# EAGLE board MakeAI_EaglePCBBoard (EAGLE 9.3.0)
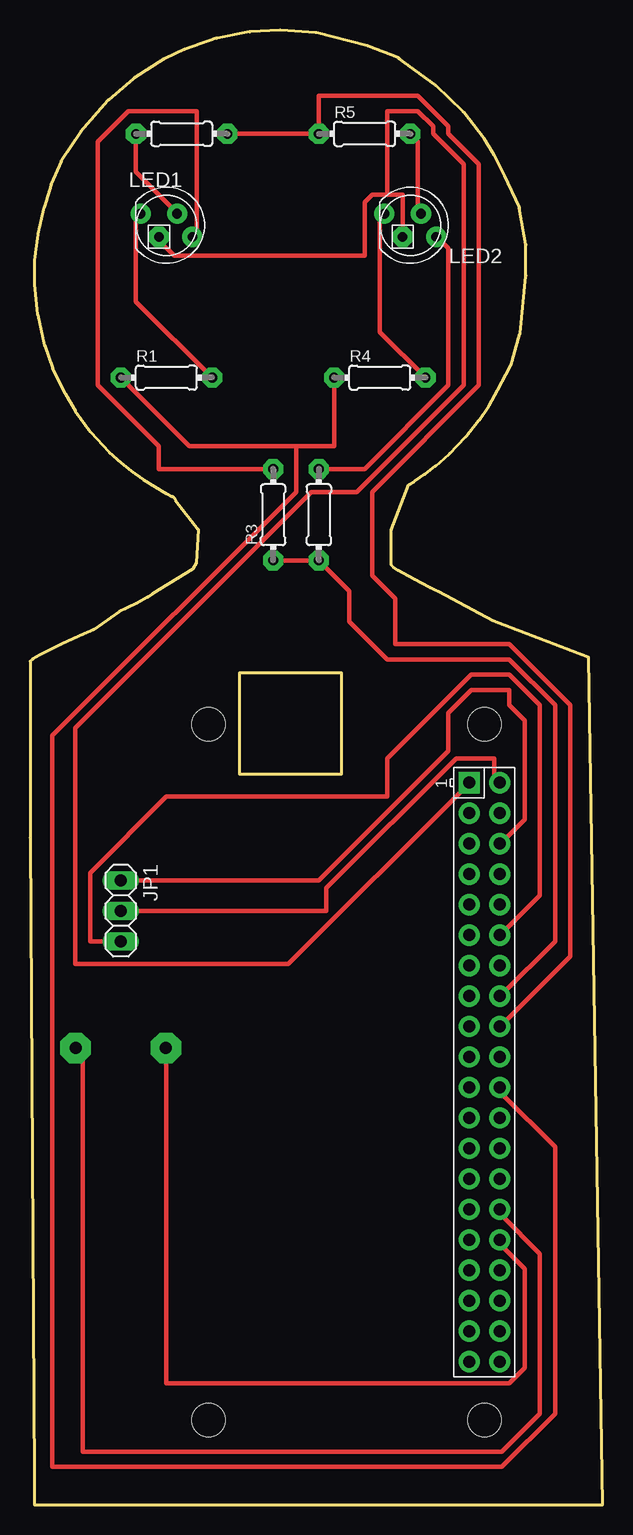
[diagram p0: board, top side]
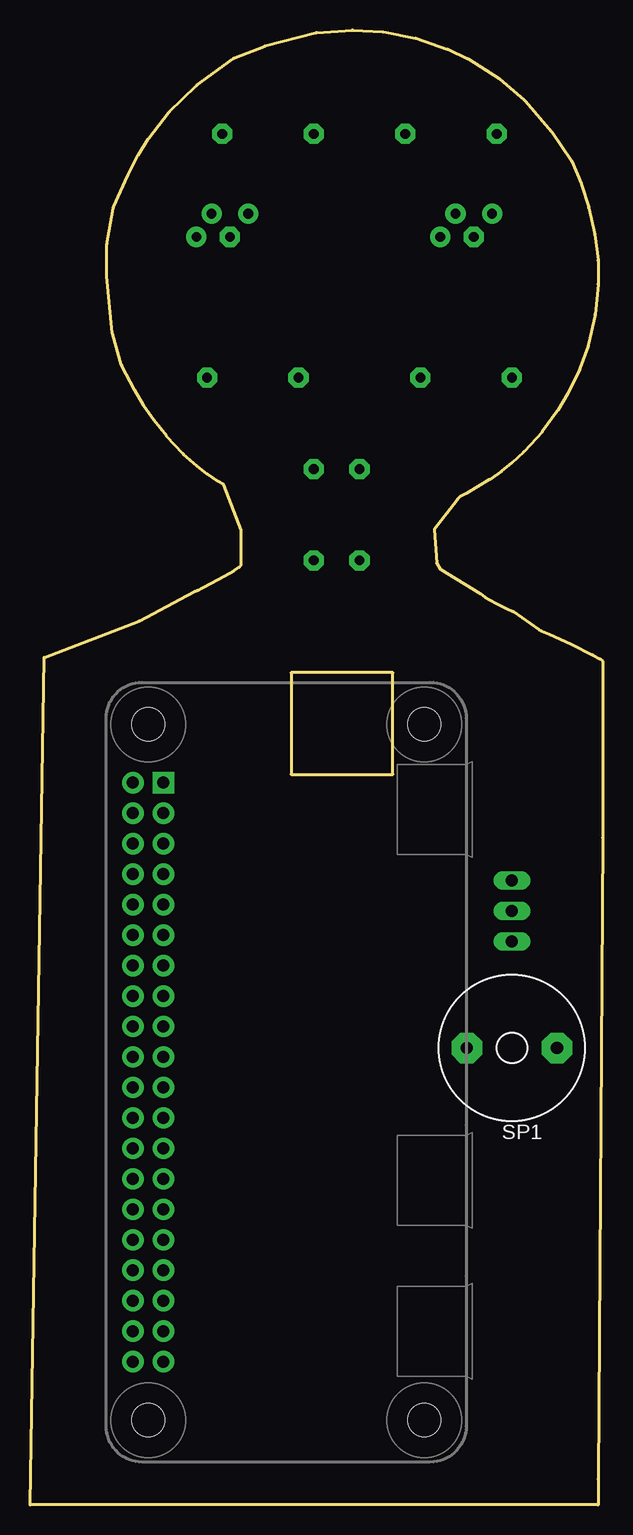
[diagram p1: board, bottom side, seen from below]

Size 47.72 x 122.96 mm. Coordinates in mm from the lower left corner, seen from the top.
Outline: 0,55.62 0.37,2.17 0.37,0 47.72,0 46.54,70.66 38.62,73.71 34.03,76.15 33.79,76.25 33.32,76.47 31.98,77.17 30.69,77.9 30.28,78.17 30.12,78.33 30.12,81.28 31.58,85.04 32.03,85.32 32.05,85.33 32.91,85.92 32.93,85.94 33.77,86.59 33.8,86.61 34.94,87.62 34.97,87.65 36.32,89.06 36.34,89.09 37.4,90.42 37.42,90.44 38.23,91.61 38.25,91.65 38.97,92.94 40.06,94.98 arc12 40.1,95.07 40.83,97.59 arc11 40.85,97.68 41.33,102.45 41.33,102.5 41.33,104.98 arc10 41.32,105.07 40.79,108.1 arc15 40.75,108.21 39.56,110.82 38.72,112.48 38.7,112.52 37.85,113.91 37.81,113.95 36.15,116.09 36.1,116.14 33.86,118.3 33.81,118.34 30.78,120.57 arc15 30.67,120.63 28.17,121.61 28.11,121.63 23.89,122.73 arc10 23.81,122.74 20.88,122.96 20.82,122.96 18.33,122.81 18.27,122.8 15.6,122.28 15.53,122.26 12.93,121.37 12.88,121.35 11.25,120.57 11.2,120.55 8.66,118.94 8.61,118.9 6.52,117.11 arc9 6.47,117.06 4.25,114.47 4.21,114.43 2.63,112.1 arc11 2.59,112.02 1.78,110.16 1.76,110.11 1.17,108.17 1.16,108.14 0.66,105.94 0.65,105.89 0.37,103.79 0.37,103.73 0.37,101.78 0.37,101.73 0.62,99.27 0.63,99.22 1.2,96.7 1.21,96.64 1.89,94.72 1.91,94.66 2.91,92.68 2.92,92.65 3.76,91.23 3.78,91.19 5.02,89.49 5.05,89.44 6.55,87.82 6.58,87.79 7.59,86.87 7.61,86.85 8.4,86.21 8.43,86.19 9.42,85.48 9.45,85.46 11.35,84.33 11.38,84.31 11.87,84.07 arc-45 12.11,83.79 14.02,81.32 13.84,78.51 13.54,78.02 10.22,75.99 9.82,75.67 8.92,75.18 7.98,74.73 7.45,74.5 5.3,72.98 5.07,72.87 4.47,72.6 2.63,71.76 0.8,70.86 0.21,70.53 0,70.34 0,55.62
Outline: 25.96,60.9 17.48,60.9 17.48,69.38 25.96,69.38 25.96,60.9
Copper layers (1*16): Top 0.035mm / dielectric 1.5mm / Bottom 0.035mm
Design rules "default": minimum track width 6mil, minimum drill 0.35mm, track to track 6mil, track to pad 6mil, pad to pad 6mil, via to via 6mil, smd to smd 6mil, copper to edge 40mil, drill to drill 6mil, minimum pad ring 10mil, minimum via ring 8mil, stop-mask expansion 4mil, vias tented up to drill 0mil, thermal gap 10mil
Net classes: 0 default: width 0.381 mm, drill 0.533 mm, clearance 0.406 mm

## Footprints (pad centres in the part's own frame; a part is rotated, then mirrored left to right if it is on the bottom)
1X03 = drill 1.016 long: 1 -2.54,0; 2 0,0; 3 2.54,0
LED5MMRGB = drill 0.8 pad 1.676: 1 -2.159,0.968; 3 0.889,0.968; 4 2.159,-0.968 | drill 0.8 pad 1.676 octagon: 2 -0.635,-0.968
0204/7 = drill 0.813 pad 1.676 octagon: 1 -3.81,0; 2 3.81,0
AL60P = drill 1.016 pad 2.54 octagon: 1 -3.759,0; 2 3.759,0
RASPBERRYPI_BASTELSTUBE_V13_RASPI_BOARD_B+_FULL = drill 1 pad 1.778 square: 1 8.37,25.23 | drill 1 pad 1.778: 2 8.37,27.77; 3 10.91,25.23; 4 10.91,27.77; 5 13.45,25.23; 6 13.45,27.77; 7 15.99,25.23; 8 15.99,27.77; 9 18.53,25.23; 10 18.53,27.77; 11 21.07,25.23; 12 21.07,27.77; 13 23.61,25.23; 14 23.61,27.77; 15 26.15,25.23; 16 26.15,27.77; 17 28.69,25.23; 18 28.69,27.77; 19 31.23,25.23; 20 31.23,27.77; 21 33.77,25.23; 22 33.77,27.77; 23 36.31,25.23; 24 36.31,27.77; 25 38.85,25.23; 26 38.85,27.77; 27 41.39,25.23; 28 41.39,27.77; 29 43.93,25.23; 30 43.93,27.77; 31 46.47,25.23; 32 46.47,27.77; 33 49.01,25.23; 34 49.01,27.77; 35 51.55,25.23; 36 51.55,27.77; 37 54.09,25.23; 38 54.09,27.77; 39 56.63,25.23; 40 56.63,27.77 | hole 2.75: 3.5,3.5; 3.5,26.5; 61.5,3.5; 61.5,26.5

## Placement (x,y rotation side)
JP1  [1X03]  7.56,49.53 270 top
LED1  RGBLED_CA-5MM  [LED5MMRGB]  11.37,106.68 0 top
LED2  RGBLED_CA-5MM  [LED5MMRGB]  31.69,106.68 0 top
R1  [0204/7]  11.37,93.98 0 top
R2  [0204/7]  12.64,114.3 180 top
R3  [0204/7]  20.26,82.55 90 top
R4  [0204/7]  29.15,93.98 0 top
R5  [0204/7]  27.88,114.3 0 top
R6  [0204/7]  24.07,82.55 90 top
SP1  SPEAKER/AL60P  [AL60P]  7.56,38.1 180 bottom
U$1  RPI-ZERO  [RASPBERRYPI_BASTELSTUBE_V13_RASPI_BOARD_B+_FULL]  11.37,68.58 270 top

## Library data of the parts
JP1 = pinhead
LED1 LED2 R1-R6 SP1 = adafruit
U$1 = RPI-Zero

## Nets
3V3@1: LED1.2 LED2.2 U$1.1
5V0@1: JP1.2 U$1.2
GND@6: SP1.1 U$1.30
GND@8: JP1.1 U$1.6
N$1: JP1.3 U$1.12
N$2: LED1.1 R1.2
N$3: LED1.3 R2.2
N$4: LED1.4 R3.2
N$5: R2.1 R5.1 U$1.18
N$6: R1.1 R4.1 U$1.22
N$7: R3.1 R6.1 U$1.16
N$8: SP1.2 U$1.32
N$9: LED2.1 R4.2
N$10: U$1.35
N$11: LED2.3 R5.2
N$12: LED2.4 R6.2

## Tracks (layer width: path | path; a pad name or v marks a point on that pad's centre or on a via)
3V3@1
  Top 0.381: 29.79,109.22 31.06,109.22 LED2.2 | 29.79,109.22 28.52,109.22 27.88,108.58 27.88,104.14 12.01,104.14 10.74,105.41 LED1.2 | 29.79,109.22 29.79,116.2 31.69,116.2 32.33,116.2 33.6,114.94 33.6,114.3 36.14,111.76 36.14,93.34 27.25,84.45 23.44,84.45 3.75,64.77 3.75,45.09 21.53,45.09 36.14,59.69 U$1.1
5V0@1
  Top 0.381: JP1.2 24.71,49.53 24.71,51.44 35.5,62.23 38.68,62.23 38.68,60.33 U$1.2
GND@6
  Top 0.381: U$1.30 39.31,24.13 42.49,20.95 42.49,7.62 39.31,4.45 4.39,4.45 4.39,38.1 SP1.1
GND@8
  Top 0.381: JP1.1 24.07,52.07 34.87,62.87 34.87,66.04 36.77,67.94 39.95,67.94 39.95,66.67 41.22,65.41 41.22,57.15 39.31,55.24 U$1.6
N$1
  Top 0.381: JP1.3 5.02,46.99 5.02,52.7 11.37,59.05 29.79,59.05 29.79,62.23 36.77,69.22 39.95,69.22 42.49,66.67 42.49,50.8 39.31,47.62 U$1.12
N$2
  Top 0.381: R1.2 8.83,100.33 8.83,107.31 LED1.1
N$3
  Top 0.381: R2.2 8.83,111.12 12.01,107.95 LED1.3
N$4
  Top 0.381: R3.2 10.74,86.36 10.74,88.27 5.66,93.34 5.66,113.67 8.2,116.2 13.91,116.2 13.91,106.05 LED1.4
N$5
  Top 0.381: R2.1 R5.1 24.07,117.47 32.33,117.47 34.87,114.94 34.87,114.78 34.87,114.3 37.41,111.76 37.41,93.34 28.52,84.45 28.52,77.47 30.42,75.56 30.42,71.75 39.95,71.75 45.03,66.67 45.03,45.72 39.31,40.01 U$1.18
N$6
  Top 0.381: R1.1 13.28,88.27 22.17,88.27 | 22.17,88.27 25.34,88.27 R4.1 | 22.17,88.27 22.17,84.45 1.85,64.14 1.85,3.17 39.31,3.17 43.76,7.62 43.76,29.84 39.31,34.29 U$1.22
N$7
  Top 0.381: R3.1 R6.1 26.61,76.2 26.61,73.66 29.79,70.48 39.95,70.48 43.76,66.67 43.76,46.99 39.31,42.55 U$1.16
N$8
  Top 0.381: U$1.32 39.31,21.59 41.22,19.68 41.22,11.43 39.95,10.16 11.37,10.16 11.37,38.1 SP1.2
N$9
  Top 0.381: R4.2 29.15,97.79 29.15,107.31 LED2.1
N$11
  Top 0.381: R5.2 32.33,113.67 32.33,107.95 LED2.3
N$12
  Top 0.381: R6.2 27.88,86.36 34.87,93.34 34.87,104.78 34.23,105.41 LED2.4